# Altium PCB PCB2.PcbDoc
Units mm, origin at the board's own origin, x right, y up, seen from the top; angles counter-clockwise.
Board outline 60 x 36 mm, 2 copper layers (Top Layer, Bottom Layer); 28 components, 18 nets, 78 pads, 68 vias.
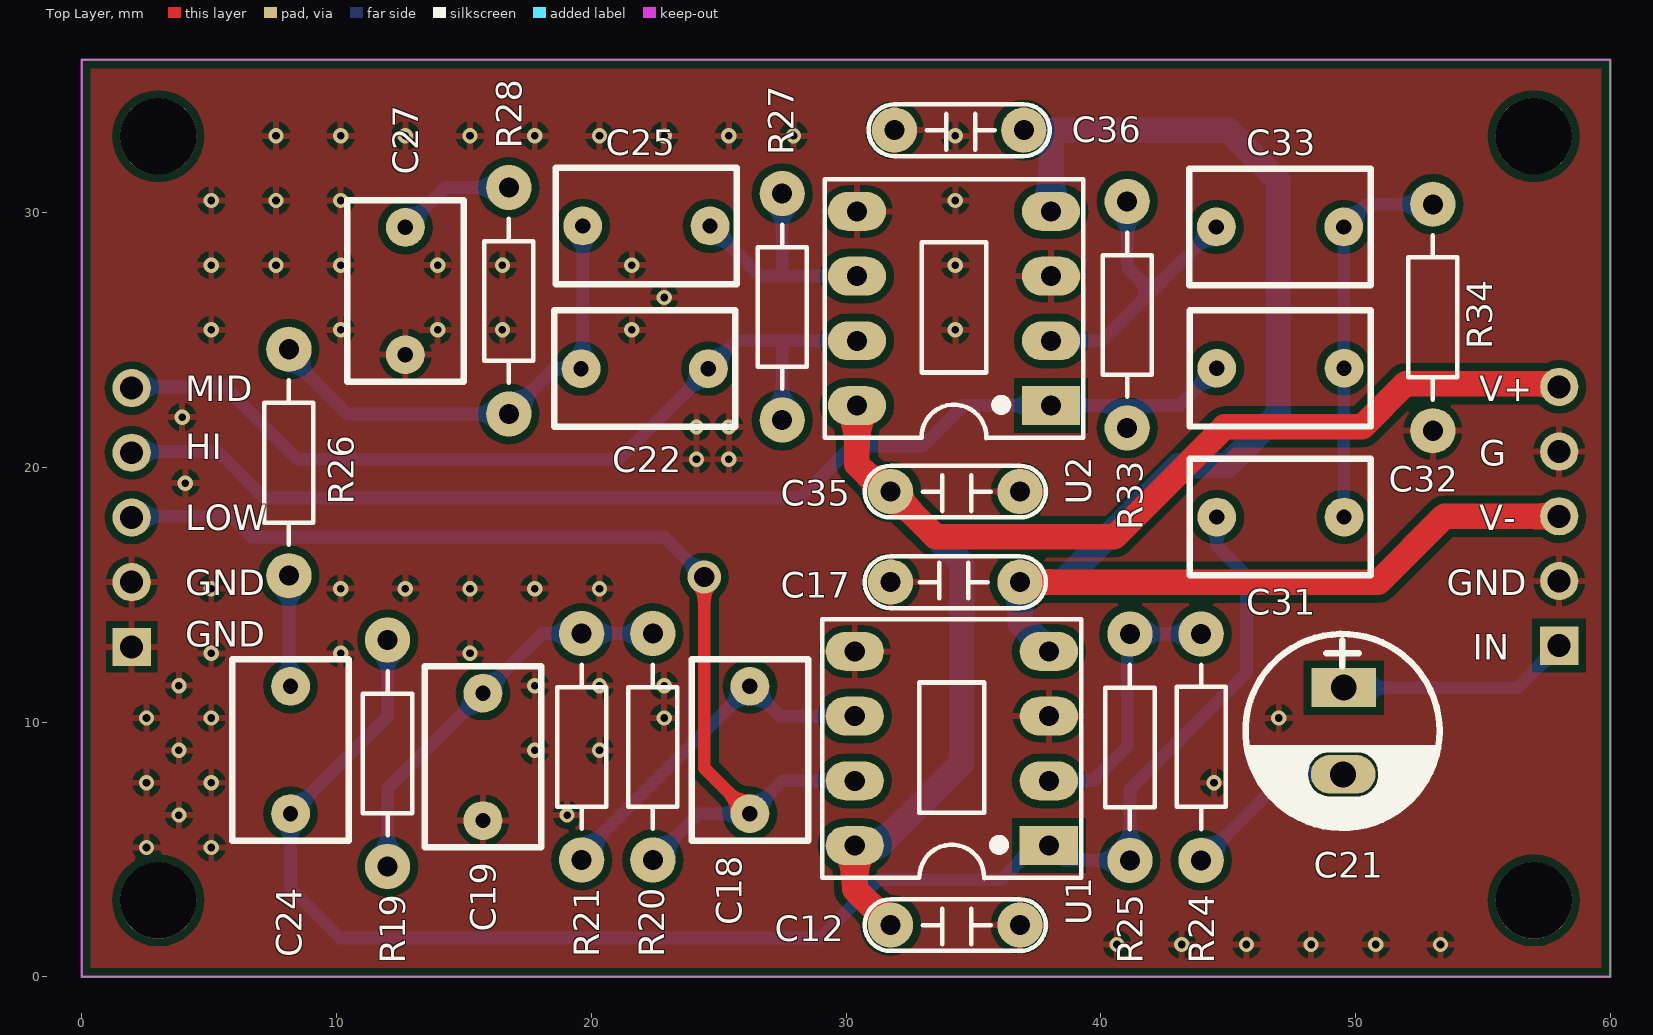
[diagram p0: Top Layer view]
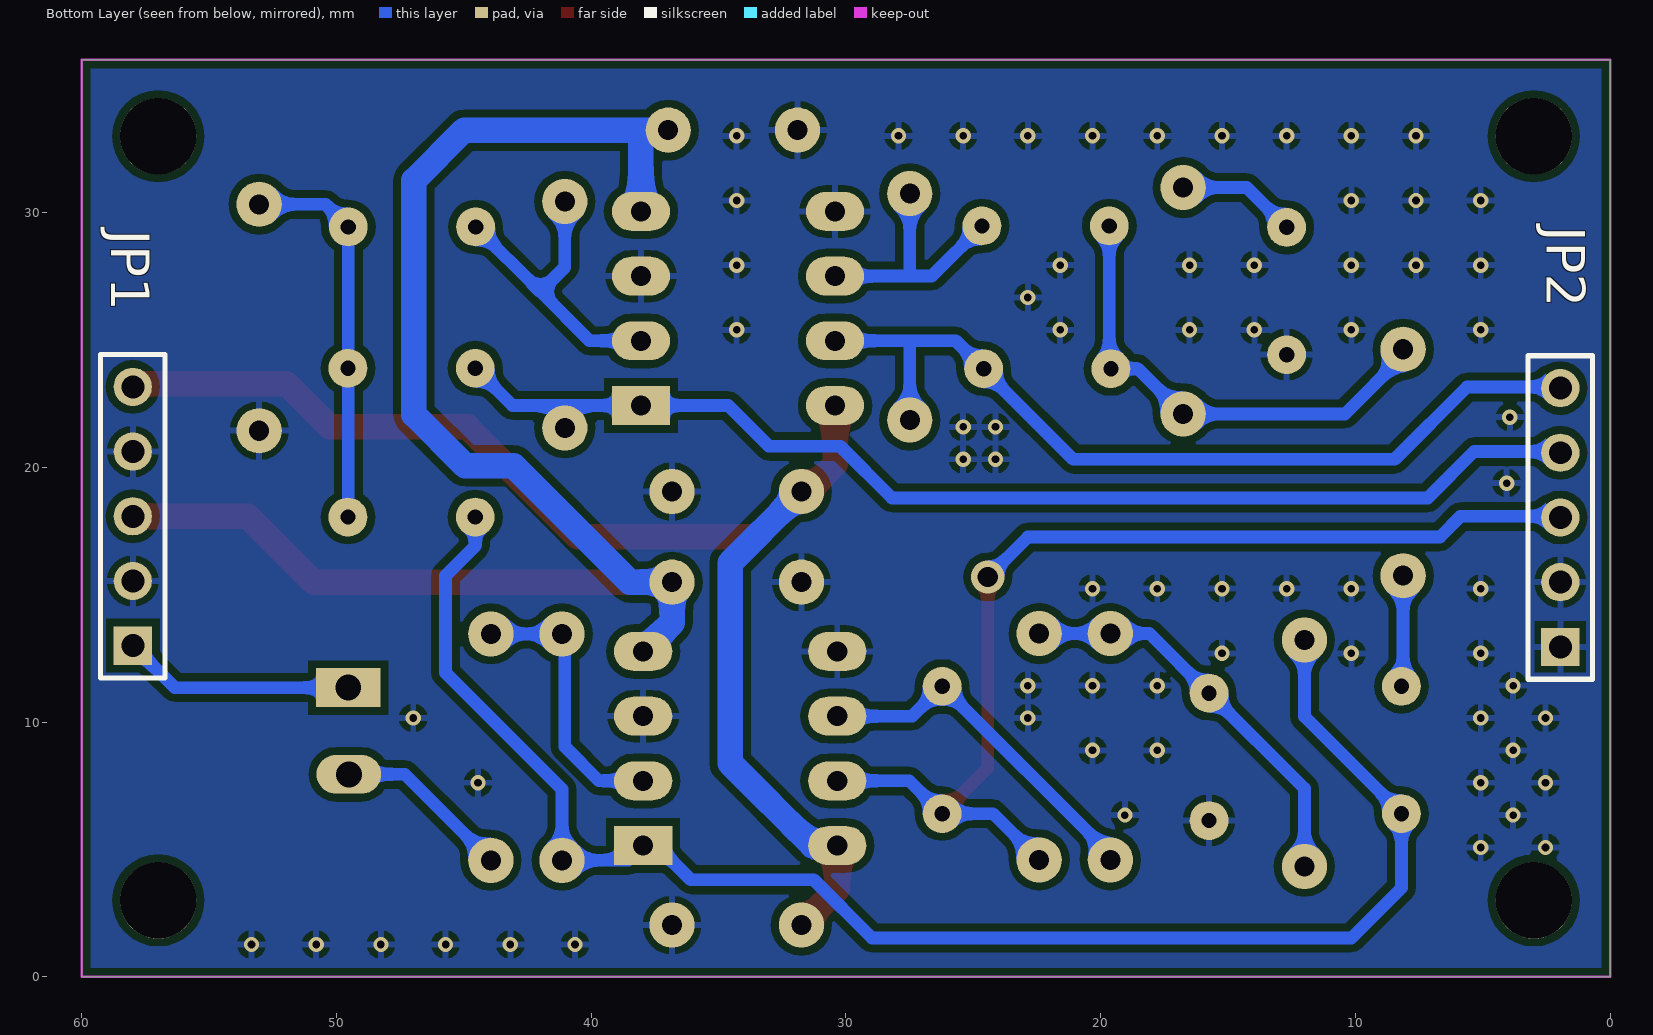
[diagram p1: Bottom Layer view, seen from below]
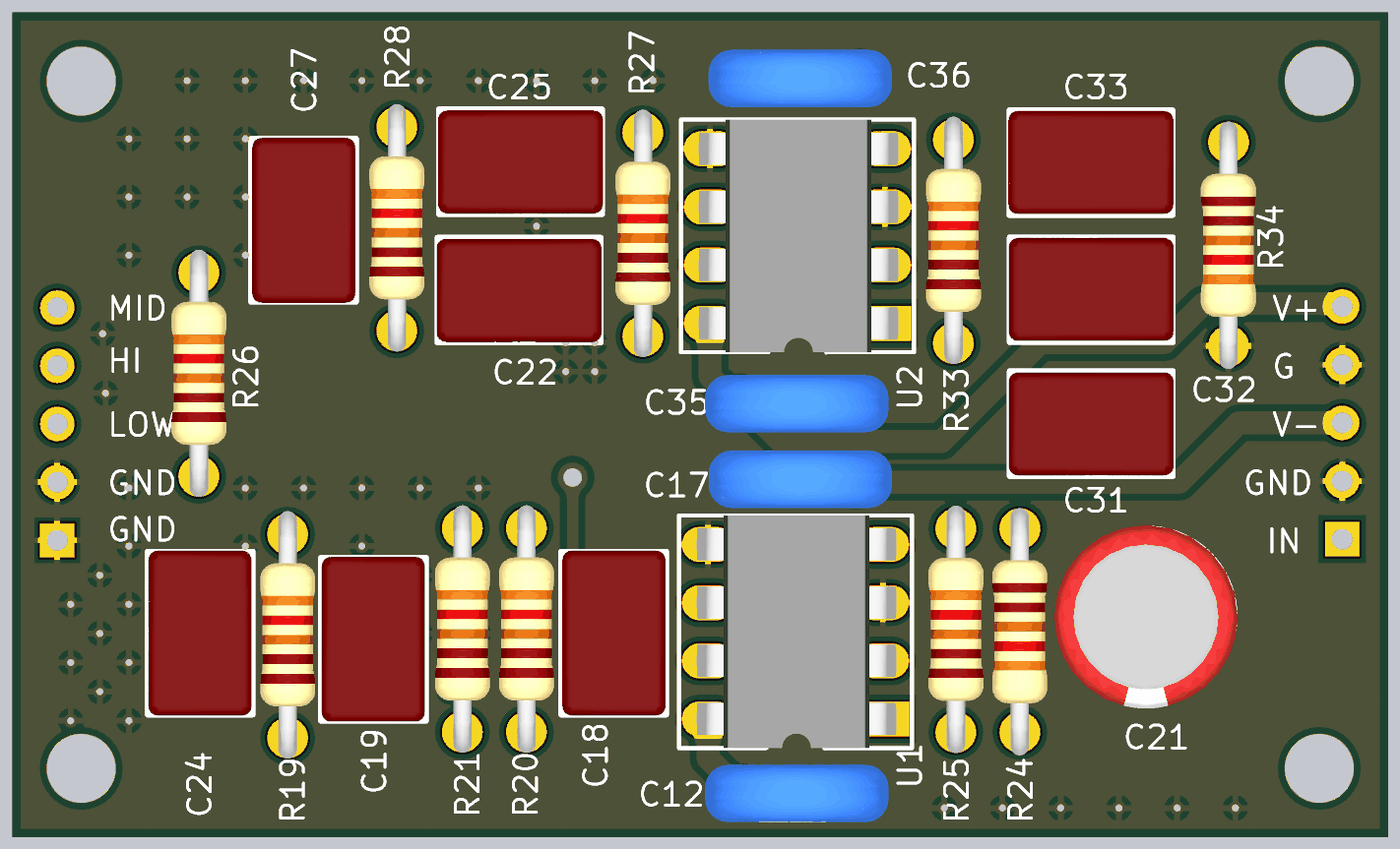
[diagram p2: 3D render of the assembled board from above, using the file's embedded part models]

## Layer stack, top to bottom
Top Solder: solder mask 0.0102, Solder Resist, Dk 3.5
Top Layer: signal copper 0.0356
Dielectric 1: dielectric 0.32, FR-4, Dk 4.8
Bottom Layer: signal copper 0.0356
Bottom Solder: solder mask 0.0102, Solder Resist, Dk 3.5

## Board outline
0,0 60,0 60,36 0,36

## Design rules (kind name [scope] priority, off if disabled: settings)
Clearance [All] p1: gap=0.3
PolygonConnect [All] p1: connectstyle=Relief reliefconductorwidth=0.254 reliefentries=4 polygonreliefangle="90 Angle" airgapwidth=0.254
RoutingVias [All] p1: holewidth=0.35 width=0.6 viastyle="Through Hole" minholewidth=0.3 minwidth=0.3 maxholewidth=1 maxwidth=5
SolderMaskExpansion [All] p1: expansion=0.102
Width [All] p1: maxlimit=1 minlimit=0.3 preferedwidth=0.35
30 further rules are at their usual default settings.

## Components (designator, comment, footprint, x,y, rotation, side; value= is the part's Value field where it differs from the comment)
C12 "104" TU_GOM(104-->105pF) 34.29,2.032 r180 top
C17 "104" TU_GOM(104-->105pF) 34.29,15.494 r0 top
C18 "562" WIMA-FKP-2-1nF 26.226,8.906 r270 top
C19 "222" WIMA-FKP-2-1nF 15.748,8.636 r90 top
C21 "1uF" CP1/3.0 49.53,9.652 r270 top
C22 "102" WIMA-FKP-2-1nF 22.098,23.876 r180 top
C24 "103" WIMA-FKP-2-1nF 8.192,8.906 r90 top
C25 "152" WIMA-FKP-2-1nF 22.162,29.48 r180 top
C27 "152" WIMA-FKP-2-1nF 12.7,26.924 r270 top
C31 "471" WIMA-FKP-2-1nF 47.054,18.05 r180 top
C32 "471" WIMA-FKP-2-1nF 47.054,23.892 r0 top
C33 "471" WIMA-FKP-2-1nF 47.04,29.44 r0 top
C35 "104" TU_GOM(104-->105pF) 34.29,19.05 r180 top
C36 "104" TU_GOM(104-->105pF) 34.44,33.24 r180 top
JP1 "Jump 5_MH" "Jump 5" 58,18.08 r90 bottom
JP2 "Jump 5_MH" "Jump 5" 1.956,18.034 r90 bottom
R19 "47K" "TRO_VACH_ 1/4W" 12.002,13.224 r270 top
R20 "47K" "TRO_VACH_ 1/4W" 22.416,13.478 r270 top
R21 "47K" "TRO_VACH_ 1/4W" 19.622,13.478 r270 top
R24 "47K" "TRO_VACH_ 1/4W" 43.942,4.572 r90 top
R25 "47K" "TRO_VACH_ 1/4W" 41.148,13.462 r270 top
R26 "47K" "TRO_VACH_ 1/4W" 8.128,24.638 r270 top
R27 "220K" "TRO_VACH_ 1/4W" 27.496,30.75 r270 top
R28 "47K" "TRO_VACH_ 1/4W" 16.764,30.988 r270 top
R33 "220K" "TRO_VACH_ 1/4W" 41.04,30.44 r270 top
R34 "56K" "TRO_VACH_ 1/4W" 53.04,21.44 r90 top
U1 "TL082ACP" DIP8 34.154,8.964 r90 top
U2 "TL082ACP" DIP8 34.24,26.24 r90 top

## Footprints (in the part's own frame and the unit in brackets; to place one, negate y for a bottom-side part, rotate by r counter-clockwise, add the part's x,y. Pads: shape width x height; smd on the part's side, far side on the other; paste and mask are expansions set on the pad)
CP1/3.0 [mil]
  rect 60x100 hole 40: 1(-67,0.5)
  oval 60x100 hole 40: 2(67,-0.5)
  silkscreen extent -150,-151 150,148, body extent -156,-161 159,154, height 453
DIP8 [mil]
  rect 60x90 hole 31: 1(-150,-150)
  oval 60x90 hole 31: 2(-50,-150) 3(50,-150) 4(150,-150) 5(150,150) 6(50,150) 7(-50,150) 8(-150,150)
  silkscreen extent -200,-200 200,200, body extent -200,-190 200,186, height 201
"Jump 5" [mm]
  rect 1.5x1.5 hole 0.9: 1(-5.08,0)
  round 1.5 hole 0.9: 2(-2.54,0) 3(0,0) 4(2.54,0) 5(5.08,0)
  silkscreen extent -6.35,-1.27 6.35,1.27, body extent -6.35,-1.27 6.35,1.27, height 7
"TRO_VACH_ 1/4W" [mil] "R 1/4W, 2 Pin, 350mil"
  round 70 hole 31: 1(0,0) 2(350,0)
  silkscreen extent 48,-38 302,38, body extent -40,-47 386,47, height 111
TU_GOM(104-->105pF) [mil]
  round 70 hole 31: 1(-100,0) 2(100,0)
  silkscreen extent -140,-40 140,40, body extent -154,-44 160,55, height 407
WIMA-FKP-2-1nF [mil] "W=4.5"
  round 60 hole 23.62: 1(-98.4,0) 2(98.4,0)
  silkscreen extent -140,-90 140,90, body extent -142,-88 142,89, height 236

## Part data
C12 C17 C18 C19 C22 C24 C25 C27 C31 C32 C33 C35 C36: library part "TU_MICA_ 104 100V(2A104J)_MH"
C21: library part TU_HOA_4.7uF_100V_MH, "TU_HOA_4.7uF_100V_MH"
JP1 JP2: "Jump 5P 2.54"
R19 R20 R21 R24 R25 R26 R27 R28 R33 R34: library part TRO_VACH_1/2W_MH, "Resistor"
U1 U2: "JFET-Input Operational Amplifier"

## Free pads (board coordinates)
  round 3 hole 3 mask+0.001: 0(3,3) 1(3,33) 2(57,33) 3(57,3)

## Via types
v1: diameter 0.6, hole 0.3, Top Layer to Bottom Layer, tented both sides, 67 vias
v2: diameter 1.3, hole 0.8, Top Layer to Bottom Layer, tented both sides, 1 vias

## Nets (pads, with @x,y where several pads share a name; then routed paths per layer and width w, separated by ;. In a path a pad name is that pad's centre, name@x,y a point inside that pad or via, vN(x,y) a via of type N, cw(c..) or ccw(c..) an arc to the next point about the centre after c; other vN are vias at no path point)
+15V: C12.2 C35.2 JP1.5 U1.8 U2.8 | length 54.7
  Top Layer w1: U1.8 30.344,3.438 C12.2 ; U2.8 30.43,20.116 C35.2@31.75,18.796 ; C35.2 33.528,17.272 40.538,17.272 44.856,21.59 50.267,21.59 51.968,23.292 57.868,23.292 JP1.5
  Bottom Layer w1: U1.8 31.316,5.154 34.544,8.382 34.544,16.256 32.004,18.796 C35.2@31.75,18.796
-15V: C17.2 C36.1 JP1.3 U1.4 U2.4 | length 61.5
  Top Layer w1: C17.2 50.902,15.494 53.488,18.08 JP1.3
  Bottom Layer w1: C36.1 38.176,33.24 ; U1.4 36.83,13.908 C17.2 38.481,15.494 43.053,20.066 44.958,20.066 46.965,22.073 46.965,31.267 44.992,33.24 38.176,33.24 ; U2.4 38.05,33.114 38.176,33.24
GND: C12.1 C17.1 C19.1 C27.2 C35.1 C36.2 JP1.2 JP1.4 JP2.1 JP2.2 R34.1 U1.3 U1.5 U2.3 U2.5
  other v1: 40.64,1.27 43.18,1.27 45.72,1.27 48.26,1.27 50.8,1.27 53.34,1.27 2.54,5.08 5.08,5.08 3.81,6.35 19.05,6.35 2.54,7.62 5.08,7.62 44.45,7.62 3.81,8.89 17.78,8.89 20.32,8.89 2.54,10.16 5.08,10.16 22.86,10.16 46.99,10.16 3.81,11.43 17.78,11.43 20.32,11.43 22.86,11.43 5.08,12.7 10.16,12.7 15.24,12.7 5.08,15.24 10.16,15.24 12.7,15.24 15.24,15.24 17.78,15.24 20.32,15.24 4.064,19.38 24.13,20.32 25.4,20.32 24.13,21.59 25.4,21.59 3.937,21.971 5.08,25.4 10.16,25.4 13.97,25.4 16.51,25.4 21.59,25.4 34.29,25.4 22.86,26.67 5.08,27.94 7.62,27.94 10.16,27.94 13.97,27.94 16.51,27.94 21.59,27.94 34.29,27.94 5.08,30.48 7.62,30.48 10.16,30.48 34.29,30.48 7.62,33.02 10.16,33.02 12.7,33.02 15.24,33.02 17.78,33.02 20.32,33.02 22.86,33.02 25.4,33.02 27.94,33.02 34.29,33.02
HIGHT: C32.1 JP2.4 R33.2 U2.1 | length 46.3
  Bottom Layer w0.5: JP2.4@2,20.62 5.339,20.62 7.163,18.796 28.194,18.796 30.226,20.828 33.02,20.828 34.622,22.43 U2.1 R33.2@41,22.43 ; R33.2 41.04,22.39 R33.2@41,22.43 ; C32.1 43.093,22.43 R33.2@41,22.43
IN_L: C21.1 JP1.1 | length 9.1
  Bottom Layer w0.5: C21.1 56.354,11.354 JP1.1
LOW: C18.2 JP2.3 R20.2 U1.7 | length 43.4
  Top Layer w0.5: v2(24.435,15.697) 24.435,8.198 C18.2
  Bottom Layer w0.5: JP2.3@2,18.08 5.872,18.08 6.68,17.272 22.86,17.272 v2(24.435,15.697) ; R20.2 24.235,6.407 C18.2 27.513,7.694 U1.7 U1.7@31.062,7.694
MID: C22.1 JP2.5 R27.2 U2.7 | length 34.7
  Bottom Layer w0.5: JP2.5@2,23.16 5.618,23.16 8.458,20.32 21.082,20.32 24.597,23.835 C22.1 25.691,24.97 27.432,24.97 ; R27.2 27.496,24.906 27.432,24.97 ; U2.7 27.432,24.97
NetC18_1: C18.1 R21.2 U1.6 | length 14.2
  Bottom Layer w0.5: R21.2 19.622,4.801 C18.1 27.397,10.234 U1.6
NetC19_2: C19.2 R19.2 R20.1 R21.1 | length 16
  Bottom Layer w0.5: R19.2 12.002,7.389 C19.2 18.091,13.478 R21.1 R20.1
NetC21_2: C21.2 R24.1 | length 7
  Bottom Layer w0.5: R24.1 47.32,7.95 C21.2
NetC22_2: C22.2 C25.2 R26.1 R28.2 | length 19
  Bottom Layer w0.5: R26.1 8.128,24.384 10.414,22.098 R28.2 18.542,23.876 C22.2 19.663,23.94 C25.2
NetC24_1: C24.1 C31.2 R19.1 R25.2 U1.1 | length 62.7
  Bottom Layer w0.5: R19.1 12.002,10.217 C24.1 8.192,3.492 10.16,1.524 28.981,1.524 31.267,3.81 36.093,3.81 37.437,5.154 U1.1 38.546,4.572 R25.2 41.148,7.366 45.72,11.938 45.72,15.748 44.555,16.913 C31.2
NetC24_2: C24.2 R26.2 | length 4.7
  Bottom Layer w0.5: R26.2 8.128,11.469 C24.2 C24.2@8.446,11.659
NetC25_1: C25.1 R27.1 U2.6 | length 9.9
  Bottom Layer w0.5: C25.1 26.631,27.51 27.432,27.51 ; R27.1 27.496,27.574 27.432,27.51 ; U2.6 27.432,27.51
NetC27_1: C27.1 R28.1 | length 4.7
  Bottom Layer w0.5: C27.1 14.265,30.988 R28.1
NetC31_1: C31.1 C32.2 C33.2 R34.2 | length 15.3
  Bottom Layer w0.5: C31.1 49.539,18.064 C33.2 50.429,30.33 R34.2
NetC33_1: C33.1 R33.1 U2.2 | length 12.3
  Bottom Layer w0.5: U2.2 40.071,24.97 42,26.899 ; R33.1 41.04,27.859 42,26.899 ; C33.1 42,26.899
NetR24_2: R24.2 R25.1 U1.2 | length 11
  Bottom Layer w0.5: U1.2 39.694,7.694 41.04,9.04 R25.1@41.04,13.64 ; R25.1 R24.2

## Polygon pours and split planes (outlines as drawn)
GND on Top Layer "Bottom Layer-No Net 1" (solid, pour order 2): 0,36 0,0 60,0 60,36
GND on Bottom Layer "Bottom Layer-No Net 1" (solid, pour order 4): 0,36 0,0 60,0 60,36

## Keep-outs
Keep-Out Layer:
  the board outline again, w0.1

## Silkscreen, mask and mechanical layers (free items; w line width, h text height)
Top Overlay:
  text "MID" at 4.064,22.606 h1
  text "V+" at 54.864,22.606 h1
  text "HI" at 4.064,20.32 h1
  text "G" at 54.864,20.066 h1
  text "LOW" at 4.064,17.526 h1
  text "V-" at 54.864,17.526 h1
  text "GND" at 4.064,14.986 h1
  text "GND" at 53.594,14.986 h1
  text "GND" at 4.064,12.954 h1
  text "IN" at 54.61,12.446 h1